# Altium PCB LithiumBatteryPack.PcbDoc
Units mil, origin at the board's own origin, x right, y up, seen from the top; angles counter-clockwise.
Board outline 15052.44 x 1445 mil, 2 copper layers (Top Layer, Bottom Layer); 16 components, 7 nets, 69 pads, 0 vias.
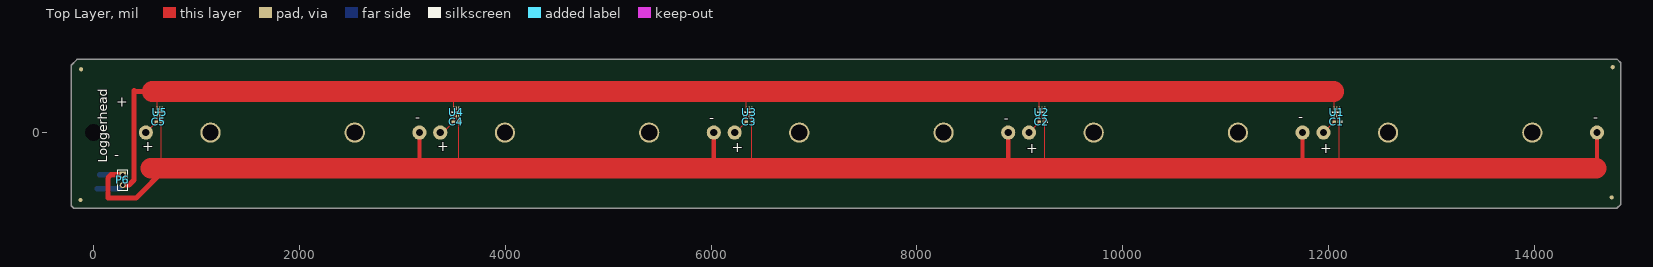
[diagram p0: Top Layer view]
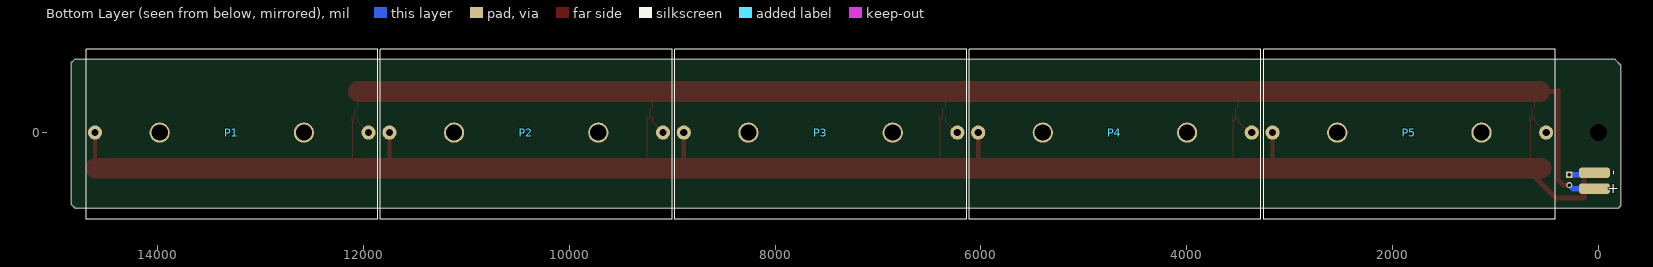
[diagram p1: Bottom Layer view, seen from below]

## Layer stack, top to bottom
Top Solder: solder mask 0.4, Solder Resist, Dk 3.5
Top Layer: signal copper 1.4
Dielectric 1: dielectric 12.6, FR-4, Dk 4.8
Bottom Layer: signal copper 1.4
Bottom Solder: solder mask 0.4, Solder Resist, Dk 3.5

## Board outline
-190.59,-734.41 -215,-710 -215,655 -160,710 14805,710 14837.44,677.56 14837.44,-697.56 14800,-735

## Design rules (kind name [scope] priority, off if disabled: settings)
Clearance [All] p1: gap=10
PolygonConnect [All] p1: connectstyle=Relief reliefconductorwidth=10 reliefentries=4 polygonreliefangle="90 Angle" airgapwidth=10
RoutingVias [All] p1: holewidth=28 width=50 viastyle="Through Hole" minholewidth=28 minwidth=50 maxholewidth=28 maxwidth=50
SolderMaskExpansion [All] p1: expansion=4
Width [All] p1: maxlimit=200 minlimit=10 preferedwidth=10
29 further rules are at their usual default settings.

## Components (designator, comment, footprint, x,y, rotation, side; value= is the part's Value field where it differs from the comment)
C1 "1uF" 0402 12079.41,104.41 r180 top
C2 "1uF" 0402 9214.41,104.41 r180 top
C3 "1uF" 0402 6369.41,104.41 r180 top
C4 "1uF" 0402 3523.82,104.41 r180 top
C5 "1uF" 0402 634.41,104.41 r180 top
P1 "D-cell" Battery-D 13278.23,0 r0 bottom
P2 "D-cell" Battery-D 10418.23,0 r0 bottom
P3 "D-cell" Battery-D 7558.23,0 r0 bottom
P4 "D-cell" Battery-D 4698.23,0 r0 bottom
P5 "D-cell" Battery-D 1838.23,0 r0 bottom
P6 "Header 2" HDR1X2 285,-410 r270 top
U1 "LM66100" SC-70-6 12080,199.41 r90 top
U2 "LM66100" SC-70-6 9215,199.41 r90 top
U3 "LM66100" SC-70-6 6370,199.41 r90 top
U4 "LM66100" SC-70-6 3524.41,199.41 r90 top
U5 "LM66100" SC-70-6 644.41,199.41 r90 top

## Footprints (in the part's own frame and the unit in brackets; to place one, negate y for a bottom-side part, rotate by r counter-clockwise, add the part's x,y. Pads: shape width x height; smd on the part's side, far side on the other; paste and mask are expansions set on the pad)
0402 [mm] "Chip Capacitor; Body 1.0 x 0.5 mm (LxW typ)"
  rect 0.9x0.7 smd: 1(-0.65,0) 2(0.65,0)
  silkscreen extent -1.4,-0.25 -1.4,0.25
Battery-D [mm] "Bulgin BX0037"
  round 3.5 hole 1.8: 0(-33.75,0) 1(33.75,0)
  round 5 hole 4: 2(-17.8,0) 3(17.8,0)
  silkscreen extent -36.02,-20.55 35.98,21.35
HDR1X2 [mm] "Connector; Header; 2 Position"
  rect 1.5x1.5 hole 0.9: 1(0,0)
  round 1.5 hole 0.9: 2(2.54,0)
  silkscreen extent -1.27,-1.27 3.81,1.27
SC-70-6 [mm] "SOT23, 6-Leads, Body 2.00x2.10mm, Pitch 0.65mm, IPC Medium Density"
  rect 0.9x0.35 smd: 1(-0.95,0.65) 2(-0.95,0) 3(-0.95,-0.65) 4(0.95,-0.65) 5(0.95,0) 6(0.95,0.65)
  silkscreen extent -1.07,-1.1 0.1,1.5, body extent -0.7,-1.07 0.7,1.08, height 1.1

## Part data
C1 C2 C3 C4 C5: library part C0402, "Ceramic Chip Capacitor - Standard"
P1 P2 P3 P4 P5: library part Battery-D
P6: "Header, 2-Pin"

## Free pads (board coordinates)
  round 40 smd paste-20 mask+5: 0(-125,-655) 0(-120,615) 0(14750,-630) 0(14760,635)
  rrect50% 300x100 smd far side mask-10: 0(40,-545) 1(40,-390)
  round 60 hole 165: 4(0,0)

## Nets (pads, with @x,y where several pads share a name; then routed paths per layer and width w, separated by ;. In a path a pad name is that pad's centre, name@x,y a point inside that pad or via, vN(x,y) a via of type N, cw(c..) or ccw(c..) an arc to the next point about the centre after c; other vN are vias at no path point)
GND: C1.1 C2.1 C3.1 C4.1 C5.1 P1.1 P2.1 P3.1 P4.1 P5.1 P6.1 pad.1 U1.2 U1.3 U1.5 U2.2 U2.3 U2.5 U3.2 U3.3 U3.5 U4.2 U4.3 U4.5 U5.2 U5.3 U5.5 | length 20306.5
  Top Layer w10: U5.5 U5.2 644.41,134.41 660,118.82 C5.1 660,-330.59 ; C5.1@670,114.41 U5.3 ; U4.5 U4.2 3524.41,135 3549.41,110 C4.1 3549.41,-340.59 ; C4.1@3550,105 U4.3 ; U3.5 U3.2 6370,139.41 C3.1@6395.59,113.82 ; 6395,-340 C3.1 ; C3.1@6395.59,105 C3.1@6395.59,113.82 ; U3.3 C3.1@6395.59,113.82 ; U2.2 9215,144.41 9240,119.41 C2.1 9240,-345 ; U2.2@9215,164.41 U2.5 ; C2.1@9240.59,105 U2.3 ; U1.5 U1.2 12086.54,155.47 12086.54,122.87 C1.1 12105,-345 ; C1.1@12105.59,105 U1.3
  Top Layer w40: 3166.97,-313.03 P5.1 ; 6026.97,-331.97 P4.1 ; 8886.97,-326.97 P3.1 ; 11746.97,-338.03 P2.1 ; 14606.97,-339.88 P1.1
  Top Layer w50: P6.1 170,-410 140,-440 140,-635 415,-635 705,-345 555,-345
  Top Layer w200: 555,-345 14601.85,-345
  Bottom Layer w50: pad.1@60,-410 P6.1
NetC1_2: C1.2 P1.0 U1.1 | length 204.6
  Top Layer w10: P1.0 12053.82,104.33 C1.2 U1.1@12053.82,161.42
NetC2_2: C2.2 P2.0 U2.1 | length 202.6
  Top Layer w10: P2.0 9188.82,99.33 C2.2 U2.1@9188.82,161.42
NetC3_2: C3.2 P3.0 U3.1 | length 214.6
  Top Layer w10: P3.0 6239.41,0 C3.2 ; C3.2@6344.41,105 U3.1
NetC4_2: C4.2 P4.0 U4.1 | length 229.8
  Top Layer w10: P4.0 3393.82,0 C4.2 3498.82,105 U4.1
NetC5_2: C5.2 P5.0 U5.1 | length 193.2
  Top Layer w10: P5.0 608.82,99.33 C5.2 ; C5.2@618.82,114.41 U5.1
POW: P6.2 pad.0@40,-545 U1.6 U2.6 U3.6 U4.6 U5.6 | length 13711.7
  Top Layer w10: U5.6 618.82,393.11 ; U4.6 3498.82,394.88 ; U3.6 6344.41,394.29 ; U2.6 9189.41,394.29 ; U1.6 12054.41,394.29
  Top Layer w50: P6.2 345,-510 395,-460 395,410 406.3,398.7 569.96,398.7
  Top Layer w200: 569.96,398.7 12050,398.7
  Bottom Layer w50: pad.0@35,-545 250,-545 P6.2
pads on no net: P1.2 P1.3 P2.2 P2.3 P3.2 P3.3 P4.2 P4.3 P5.2 P5.3 U1.4 U2.4 U3.4 U4.4 U5.4

## Silkscreen, mask and mechanical layers (free items; w line width, h text height)
Top Overlay:
  text "+" at 221.26,249.41 h100
  text "-" at 11705,104.41 h100
  text "-" at 3125,99.41 h100
  text "-" at 14570,99.41 h100
  text "-" at 5985,94.41 h100
  text "-" at 8845,89.41 h100
  text "+" at 475,-180.59 h100
  text "+" at 3340,-180.59 h100
  text "+" at 6200,-190.59 h100
  text "+" at 9060,-200.59 h100
  text "+" at 11920,-200.59 h100
  text "-" at 201.26,-265.59 h100
  text "Loggerhead" at 162.44,-295 h150 r90
Bottom Overlay:
  text "-" at -110,-415 h100 r90
  text "+" at -200,-590 h100
Mechanical 1:
  lines w10: -190.59,-735 14800,-735 14837.44,-697.56 14837.44,677.56 14805,710 -160,710 -215,655 -215,-710 -190.59,-734.41